# Altium PCB PcbForConverter.PcbDoc
Units mm, origin at the board's own origin, x right, y up, seen from the top; angles counter-clockwise.
Board outline 30 x 11 mm, 2 copper layers (Top Layer, Bottom Layer), stack 1.971 mm thick; 20 components, 20 nets, 94 pads, 41 vias.
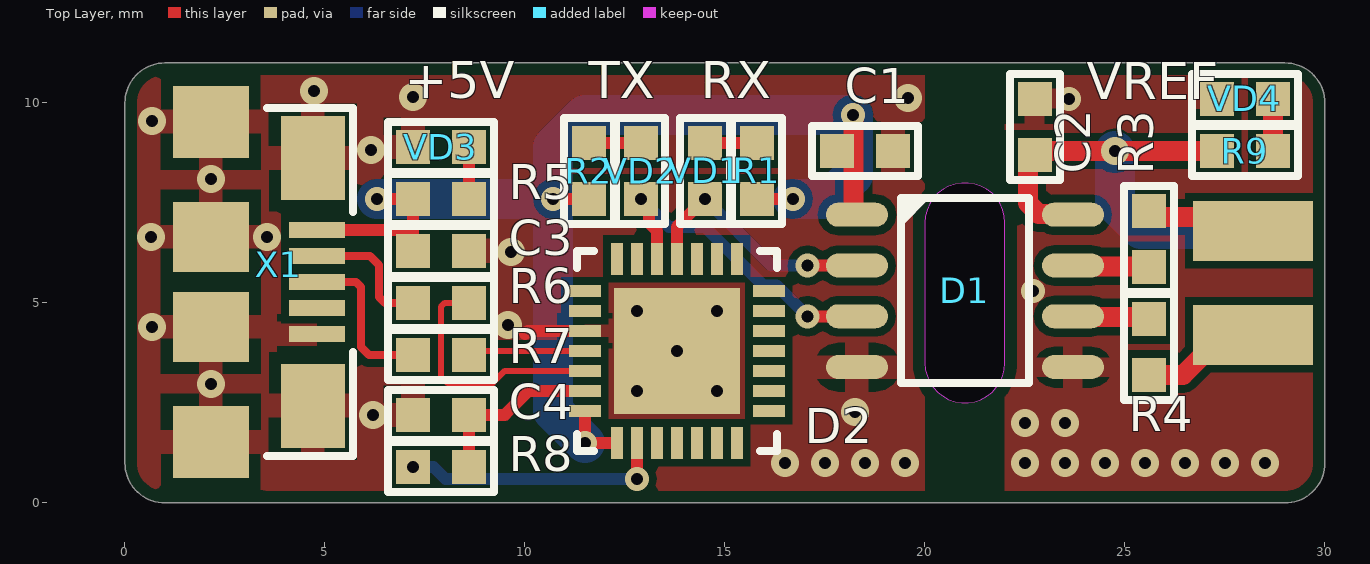
[diagram p0: Top Layer view]
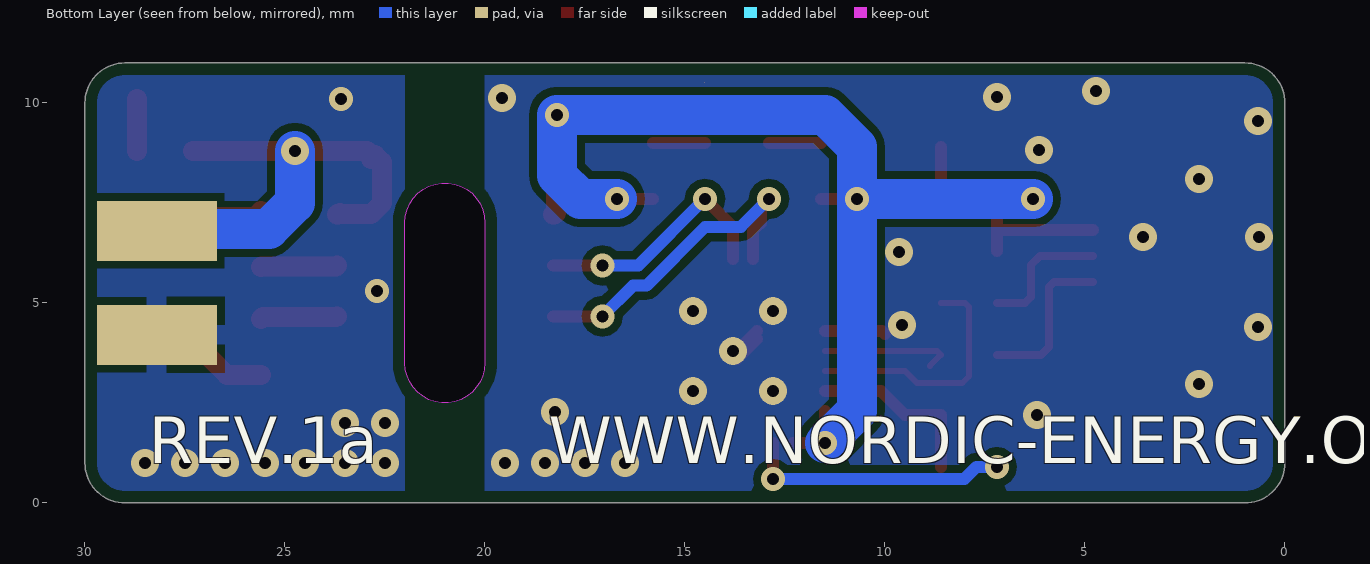
[diagram p1: Bottom Layer view, seen from below]
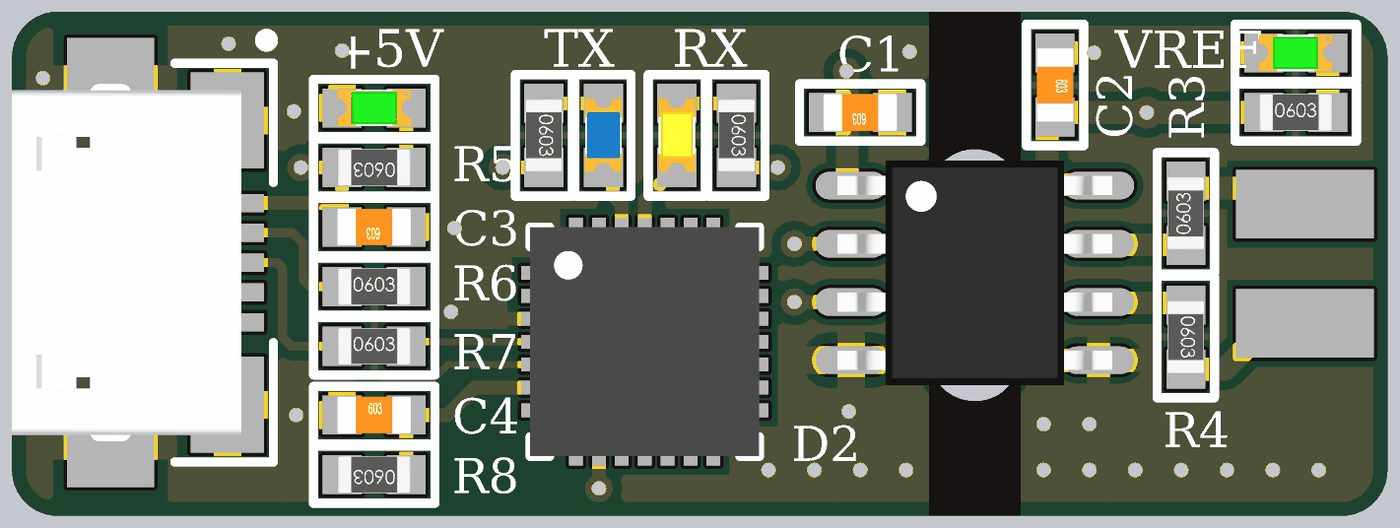
[diagram p2: 3D render of the assembled board from above, using the file's embedded part models]

## Layer stack, top to bottom
Top Solder: solder mask 0.0102, Solder Resist, Dk 3.5
Top Layer: signal copper 0.0356
Dielectric 1: dielectric 1.9, FR-4, Dk 4.8
Bottom Layer: signal copper 0.0356
Bottom Solder: solder mask 0.0102, Solder Resist, Dk 3.5

## Board outline
1,0 cw(c1,1) 0,1 0,10 cw(c1,10) 1,11 29,11 cw(c29,10) 30,10 30,1 cw(c29,1) 29,0
cut-out: 20,3.5 ccw(c21,3.5) 22,3.5 22,7 ccw(c21,7) 20,7
cut-out: 14.5,10.5

## Design rules (kind name [scope] priority, off if disabled: settings)
BoardOutlineClearance [All] p1: gap=0.3 ignorepadtopadclearanceinfootprint=FALSE
Clearance Clearance_NPTH [All vs InPadClass('NPTH')] p1: gap=0.4 ignorepadtopadclearanceinfootprint=FALSE except(0: Arc-Hole Track-Hole SMDPad-Hole THPad-Hole Via-Hole Fill-Hole Poly-Hole Region-Hole Text-Hole)
Clearance Clearance_MultiLayerPad [OnLayer('Multi-Layer') and IsPad] p2: gap=0.25 ignorepadtopadclearanceinfootprint=FALSE except(0: Arc-Hole Track-Hole SMDPad-Hole THPad-Hole Via-Hole Fill-Hole Poly-Hole Region-Hole Text-Hole)
Clearance Clearance_Polygon [InPolygon] p3: gap=0.2 ignorepadtopadclearanceinfootprint=FALSE except(0: Arc-Hole Track-Hole SMDPad-Hole THPad-Hole Via-Hole Fill-Hole Poly-Hole Region-Hole Text-Hole; 0.5: Poly-Poly)
Clearance [All] p4: gap=0.2 ignorepadtopadclearanceinfootprint=FALSE except(0: Arc-Hole Track-Hole SMDPad-Hole THPad-Hole Via-Hole Fill-Hole Poly-Hole Region-Hole Text-Hole)
Height [All] p1: minheight=0 maxheight=60 prefheight=12.7
HoleSize [All] p1: absolutevalues=TRUE maxlimit=5 minlimit=0.025 maxpercent=80.000 minpercent=20.000
HoleToHoleClearance [All] p1: gap=0.2 allowstackedmicrovias=TRUE
MinimumSolderMaskSliver [All] p1: minsoldermaskwidth=0.05
PlaneClearance [All] p1: clearance=0.5
PlaneConnect [All] p1: planeconnectstyle=Relief reliefexpansion=0.5 reliefentries=4 reliefconductorwidth=0.3 reliefairgap=0.2
PolygonConnect PolygonConnect_PowerPAD [All vs InPadClass('PowerPAD')] p1: connectstyle=Direct reliefconductorwidth=1 reliefentries=4 polygonreliefangle="90 Angle" airgapwidth=0.3
PolygonConnect PolygonConnect_PadGND [InNet('GND') and IsPad] p2: connectstyle=Relief reliefconductorwidth=0.5 reliefentries=4 polygonreliefangle="90 Angle" airgapwidth=0.2
PolygonConnect PolygonConnect_Via [IsVia] p3: connectstyle=Direct reliefconductorwidth=0.254 reliefentries=4 polygonreliefangle="90 Angle" airgapwidth=0.254
PolygonConnect [All] p4: connectstyle=Relief reliefconductorwidth=0.6 reliefentries=4 polygonreliefangle="90 Angle" airgapwidth=0.3
RoutingVias [All] p1: holewidth=0.3 width=0.7 viastyle="Through Hole" minholewidth=0.3 minwidth=0.6 maxholewidth=0.5 maxwidth=1.2
SilkToSilkClearance [All] p1: silktosilkclearance=0
SilkToSolderMaskClearance [IsPad] p1: minsilkscreentomaskgap=0.05 clearancetoexposedcopper=TRUE
SolderMaskExpansion [All] p1: expansion=0.075
Width [All] p1: maxlimit=10 minlimit=0.15 preferedwidth=0.15
22 further rules are at their usual default settings.

## Classes and differential pairs
pad class PowerPAD: D2-0

## Components (designator, comment, footprint, x,y, rotation, side; value= is the part's Value field where it differs from the comment)
C1 "Ceramic capacitor, 1μF, X7R, ±10%, 16V, 0603, -55...+125°C" "CAP: 0603" 18.5,8.8 r180 top value=1?F
C2 "Ceramic capacitor, 1μF, X7R, ±10%, 16V, 0603, -55...+125°C" "CAP: 0603" 22.75,9.4 r270 top value=1?F
C3 "Ceramic capacitor, 4.7μF, X7R, ±10%, 6.3V, 0603, -55...+125°C" "CAP: 0603" 7.9,6.3 r180 top value=4.7?F
C4 "Ceramic capacitor, 1μF, X7R, ±10%, 16V, 0603, -55...+125°C" "CAP: 0603" 7.9,2.2 r0 top value=1?F
D1 "IC digital isolator, 100Mbps, 3000Vrms, 2.25...5.5V, -55...+125°C, 8-SOIC" 8-SOIC 21,5.3 r0 top
D2 "IC usb-to-uart bridge, USB2.0, 3...3.6V, -40...+85°C, 28-VFQFN" "28-QFN (5x5)" 13.8,3.8 r0 top
R1 "Resistor film, 1k, ±5%, 0603, 0.1W, -55...+125°C" "RES: 0603" 15.8,8.3 r270 top value=1k
R2 "Resistor film, 1k, ±5%, 0603, 0.1W, -55...+125°C" "RES: 0603" 11.6,8.3 r270 top value=1k
R3 "Resistor film, 100R, ±5%, 0603, 0.1W, -55...+125°C" "RES: 0603" 25.6,6.6 r90 top value=100R
R4 "Resistor film, 100R, ±5%, 0603, 0.1W, -55...+125°C" "RES: 0603" 25.6,3.9 r270 top value=100R
R5 "Resistor film, 1k, ±5%, 0603, 0.1W, -55...+125°C" "RES: 0603" 7.9,7.6 r180 top value=1k
R6 "Resistor film, 22R, ±5%, 0603, 0.1W, -55...+125°C" "RES: 0603" 7.9,5 r0 top value=22R
R7 "Resistor film, 22R, ±5%, 0603, 0.1W, -55...+125°C" "RES: 0603" 7.9,3.7 r0 top value=22R
R8 "Resistor film, 1k, ±5%, 0603, 0.1W, -55...+125°C" "RES: 0603" 7.9,0.9 r180 top value=1k
R9 "Resistor film, 1k, ±5%, 0603, 0.1W, -55...+125°C" "RES: 0603" 28,8.8 r0 top value=1k
VD1 "LED, 20mA, 2V, 0603, -55...+150°C" "LED: 0603Y" 14.5,8.3 r270 top
VD2 "LED, 20mA, 3.2V, 0603, -55...+150°C" "LED: 0603B" 12.9,8.3 r270 top
VD3 "LED, 20mA, 2V, 0603, -55...+150°C" "LED: 0603G" 7.9,8.9 r180 top
VD4 "LED, 20mA, 2V, 0603, -55...+150°C" "LED: 0603G" 28,10.1 r180 top
X1 "USB micro B" "CON: USB micro-A (ZX62-B-5PA)" 4.8,5.525 r270 top

## Footprints (in the part's own frame and the unit in brackets; to place one, negate y for a bottom-side part, rotate by r counter-clockwise, add the part's x,y. Pads: shape width x height; smd on the part's side, far side on the other; paste and mask are expansions set on the pad)
8-SOIC [mm] "pitch 1.27 mm"
  rrect100% 1.55x0.6 smd: 1(-2.7,1.905) 2(-2.7,0.635) 3(-2.7,-0.635) 4(-2.7,-1.905) 5(2.7,-1.905) 6(2.7,-0.635) 7(2.7,0.635) 8(2.7,1.905)
  round 0.7 on Mech1: 28(-2.395,1.8)
  silkscreen extent -1.59,-2.3 1.61,2.33, body extent -3,-2.45 3,2.45, height 1.75
"28-QFN (5x5)" [mm] "5x5 mm, pitch 0.5 mm, power pad"
  round 0.7 hole 0.3: 0(-1,-1) 0(-1,1) 0(0,0) 0(1,-1) 0(1,1)
  rect 3.15x3.15 smd: 0(0,0)
  rect 0.8x0.3 smd: 1(-2.3,1.5) 2(-2.3,1) 3(-2.3,0.5) 4(-2.3,0) 5(-2.3,-0.5) 6(-2.3,-1) 7(-2.3,-1.5) 15(2.3,-1.5) 16(2.3,-1) 17(2.3,-0.5) 18(2.3,0) 19(2.3,0.5) 20(2.3,1) 21(2.3,1.5)
  rect 0.3x0.8 smd: 8(-1.5,-2.3) 9(-1,-2.3) 10(-0.5,-2.3) 11(0,-2.3) 12(0.5,-2.3) 13(1,-2.3) 14(1.5,-2.3) 22(1.5,2.3) 23(1,2.3) 24(0.5,2.3) 25(0,2.3) 26(-0.5,2.3) 27(-1,2.3) 28(-1.5,2.3)
  round 0.5 on Mech1: ""(-2,2)
  silkscreen extent -2.5,-2.5 2.5,2.5, body extent -2.5,-2.5 2.5,2.5, height 0.9
"CAP: 0603" [mm]
  rect 0.85x0.85 smd: 1(-0.7,0) 2(0.7,0)
  silkscreen extent -1.33,-0.63 1.33,0.63, body extent -0.8,-0.4 0.8,0.4, height 0.3
"CON: USB micro-A (ZX62-B-5PA)" [mm]
  rect 1.8x1.9 smd: 0(-4,-2.65) 0(4,-2.65)
  rect 2.1x1.6 smd: 0(-3.1,-0.1) 0(3.1,-0.1)
  rect 1.75x1.9 smd: 0(-1.125,-2.65) 0(1.125,-2.65)
  rect 0.4x1.4 smd: 1(-1.3,0) 2(-0.65,0) 3(0,0) 4(0.65,0) 5(1.3,0)
  round 0.5 on Top Overlay: ""(-4.85,0.75)
  silkscreen extent -4.35,-1.25 4.35,0.9, body extent -3.9,-4.8 3.9,0.2, height 2.68
"LED: 0603B" [mm]
  rect 0.85x0.85 smd: 1(-0.7,0) 2(0.7,0)
  silkscreen extent -1.33,-0.63 1.33,0.6, body extent -0.8,-0.4 0.8,0.4, height 0.6
"LED: 0603G" [mm]
  rect 0.85x0.85 smd: 1(-0.7,0) 2(0.7,0)
  silkscreen extent -1.33,-0.63 1.33,0.63, body extent -0.8,-0.4 0.8,0.4, height 0.6
"LED: 0603Y" [mm]
  rect 0.85x0.85 smd: 1(-0.7,0) 2(0.7,0)
  silkscreen extent -1.33,-0.63 1.33,0.63, body extent -0.8,-0.4 0.8,0.4, height 0.6
"RES: 0603" [mm]
  rect 0.85x0.85 smd: 1(-0.7,0) 2(0.7,0)
  silkscreen extent -1.33,-0.63 1.33,0.63, body extent -0.8,-0.4 0.8,0.4, height 0.44

## Part data
C1 C2 C4: library part Ceramic_0603, Manufacturer=Samsung, Package=0603, PartNumber=CL10B105KO8NNNC, Temperature=-55...+125°C, Tolerance=±10%, TypeCapacitor="Ceramic capacitor", TypeDielectric=X7R, ValueManufacturerPartNumber="Ceramic capacitor, 1?F, X7R, ±10%, 16V, 0603, -55...+125°C", Voltage=16V, HelpURL=https://www.digikey.com/product-detail/en/samsung-electro-mechanics/CL10B105KO8NNNC/1276-1019-1-ND/3889105
C3: library part Ceramic_0603, Manufacturer=Samsung, Package=0603, PartNumber=CL10B475KQ8NQNC, Temperature=-55...+125°C, Tolerance=±10%, TypeCapacitor="Ceramic capacitor", TypeDielectric=X7R, ValueManufacturerPartNumber="Ceramic capacitor, 4.7?F, X7R, ±10%, 6.3V, 0603, -55...+125°C", Voltage=6.3V, HelpURL=https://www.digikey.com/product-detail/en/samsung-electro-mechanics/CL10B475KQ8NQNC/1276-2087-1-ND/3890173
D1: library part ISO7721DR, "Digital isolator", Manufacturer="Texas Instruments", Package=8-SOIC, Temperature=-55...+125°C, ComponentType="IC digital isolator", DataRate=100Mbps, HelpURL=https://www.digikey.com/product-detail/en/texas-instruments/ISO7721DR/296-48296-1-ND/8347715, Isolation=3000Vrms, PartNumber=ISO7721DR, Supply=2.25...5.5V, ValueManufacturerPartNumber="IC digital isolator, 100Mbps, 3000Vrms, 2.25...5.5V, -55...+125°C, 8-SOIC"
D2: library part CP2102N, "USB-to-UART", Manufacturer="Silicon Labs", Package=28-VFQFN, PartNumber=CP2102N-A02-GQFN28, Temperature=-40...+85°C, ComponentType="IC usb-to-uart bridge", HelpURL=https://www.digikey.com/product-detail/en/silicon-labs/CP2102N-A02-GQFN28/336-5889-ND/9863477, Standard=USB2.0, Supply=3...3.6V, ValueManufacturerPartNumber="IC usb-to-uart bridge, USB2.0, 3...3.6V, -40...+85°C, 28-VFQFN"
R1 R2 R5 R8 R9: library part Resistor_0603, Manufacturer=Yageo, Package=0603, PartNumber=RC0603JR-071KL, Power=0.1W, Temperature=-55...+125°C, Tolerance=±5%, TypeResistor="Resistor film", HelpURL=https://www.digikey.com/product-detail/en/yageo/RC0603JR-071KL/311-1.0KGRCT-ND/729624, ValueManufacturerPartNumber="Resistor film, 1k, ±5%, 0603, 0.1W, -55...+125°C"
R3 R4: library part Resistor_0603, Manufacturer=Yageo, Package=0603, PartNumber=RC0603JR-07100RL, Power=0.1W, Temperature=-55...+125°C, Tolerance=±5%, TypeResistor="Resistor film", HelpURL=https://www.digikey.com/product-detail/en/yageo/RC0603JR-07100RL/311-100GRCT-ND/729644, ValueManufacturerPartNumber="Resistor film, 100R, ±5%, 0603, 0.1W, -55...+125°C"
R6 R7: library part Resistor_0603, Manufacturer=Yageo, Package=0603, PartNumber=RC0603JR-0722RL, Power=0.1W, Temperature=-55...+125°C, Tolerance=±5%, TypeResistor="Resistor film", HelpURL=https://www.digikey.com/product-detail/en/yageo/RC0603JR-0722RL/311-22GRCT-ND/729690, ValueManufacturerPartNumber="Resistor film, 22R, ±5%, 0603, 0.1W, -55...+125°C"
VD1: library part LED_single, Color=YELLOW, Current=20mA, Manufacturer=Wurth, Package=0603, PartNumber=150060YS75000, Temperature=-55...+150°C, VoltageDrop=2V, HelpURL=https://www.digikey.com/product-detail/en/wurth-electronics-inc/150060YS75000/732-4981-1-ND/4489907, TypeDiode=LED, ValueManufacturerPartNumber="LED, 20mA, 2V, 0603, -55...+150°C"
VD2: library part LED_single, Color=BLUE, Current=20mA, Manufacturer=Wurth, Package=0603, PartNumber=150060BS75000, Temperature=-55...+150°C, VoltageDrop=3.2V, HelpURL=https://www.digikey.com/product-detail/en/wurth-electronics-inc/150060BS75000/732-4966-1-ND/4489893, TypeDiode=LED, ValueManufacturerPartNumber="LED, 20mA, 3.2V, 0603, -55...+150°C"
VD3 VD4: library part LED_single, Color=GREEN, Current=20mA, Manufacturer=Wurth, Package=0603, PartNumber=150060VS75000, Temperature=-55...+150°C, VoltageDrop=2V, HelpURL=https://www.digikey.com/product-detail/en/wurth-electronics-inc/150060VS75000/732-4980-1-ND/4489904, TypeDiode=LED, ValueManufacturerPartNumber="LED, 20mA, 2V, 0603, -55...+150°C"
X1: library part Connector_USB_micro_B, Manufacturer="Hirose Electric", PartNumber=ZX62-B-5PA, CommentText="\"USB\"", HelpURL=https://www.digikey.com/product-detail/en/hirose-electric-co-ltd/ZX62-B-5PA/H11579CT-ND/1851090, TypeConnector="USB micro B", ValueManufacturerPartNumber="USB micro B"

## Free pads (board coordinates)
  rect 3x1.5 smd: ""(28.2,4.2) ""(28.2,6.8)
  rect 3x1.5 smd far side: ""(28.2,4.2) ""(28.2,6.8)

## Via types
v1: diameter 0.7, hole 0.3, Top Layer to Bottom Layer, tented both sides, 28 vias
v2: diameter 0.6, hole 0.3, Top Layer to Bottom Layer, tented both sides, 13 vias

## Nets (pads, with @x,y where several pads share a name; then routed paths per layer and width w, separated by ;. In a path a pad name is that pad's centre, name@x,y a point inside that pad or via, vN(x,y) a via of type N, cw(c..) or ccw(c..) an arc to the next point about the centre after c; other vN are vias at no path point)
GND: C2.1 D1.5 pad.@28.2,4.2 VD4.2
  other v1: 22.5,1 23.5,1 24.5,1 25.5,1 26.5,1 27.5,1 28.5,1 22.5,2 23.5,2
  other v2: 22.7,5.3 23.6,10.1
GND2: C1.1 C3.1 C4.1 D1.4 D2.0 D2.3 VD3.2 X1.0 X1.5 | length 3.2
  Top Layer w0.3: 10,4.225 10.075,4.3 D2.3 ; D2.0@13.192,4.1 13.692,3.6 D2.0@13.8,3.7 ; D2.0@13.192,4.3 13.692,3.8 D2.0@13.8,3.8
  other v1: 16.5,1 17.5,1 18.5,1 19.5,1 6.2,2.2 18.25,2.275 2.15,2.975 0.675,4.4 9.575,4.45 9.65,6.275 0.65,6.65 3.55,6.65 2.15,8.1 6.15,8.825 0.675,9.55 19.575,10.125 7.2,10.15 4.725,10.3
NetC4_2: C4.2 D2.6 R8.1 | length 4.4
  Top Layer w0.3: R8.1 C4.2 9.5,2.2 10.1,2.8 D2.6
NetD1_2: D1.2 D2.25 VD1.2 | length 6.3
  Top Layer w0.3: D2.25 13.8,6.9 v2(14.5,7.6) ; v2(17.065,5.935) D1.2
  Bottom Layer w0.3: v2(14.5,7.6) 16.165,5.935 v2(17.065,5.935)
NetD1_3: D1.3 D2.26 VD2.2 | length 8.3
  Top Layer w0.3: v2(12.9,7.6) 13.1,7.4 13.1,7 13.3,6.8 D2.26 ; v2(17.065,4.665) D1.3
  Bottom Layer w0.3: v2(12.9,7.6) 13.6,6.9 14.493,6.9 15.958,5.435 16.295,5.435 v2(17.065,4.665)
NetD1_6: D1.6 R4.1 | length 1.9
  Top Layer w0.5: D1.6 23.719,4.646 25.554,4.646 R4.1
NetD1_7: D1.7 R3.1 | length 1.9
  Top Layer w0.5: D1.7 23.719,5.916 25.584,5.916 R3.1
NetD2_4: D2.4 R7.2 | length 3.3
  Top Layer w0.15: R7.2@8.875,3.425 R7.2 8.7,3.8 D2.4
NetD2_5: D2.5 R6.2 | length 6.3
  Top Layer w0.15: R6.2 8,5 7.9,4.9 7.9,3.161 8.061,3 9.2,3 9.5,3.3 D2.5
NetD2_9: D2.9 R8.2 | length 6.4
  Top Layer w0.3: v2@12.8,0.8 D2.9
  Bottom Layer w0.3: v2(7.2,0.9) 7.712,0.9 8.012,0.6 v2(12.8,0.6)
NetR1_1: R1.1 VD1.1 | length 1.3
  Top Layer w0.3: VD1.1 R1.1
NetR2_1: R2.1 VD2.1 | length 1.3
  Top Layer w0.3: R2.1 VD2.1
NetR5_1: R5.1 VD3.1 | length 1.3
  Top Layer w0.3: R5.1 VD3.1
NetR6_1: R6.1 X1.2 | length 3.4
  Top Layer w0.2: X1.2 6.125,6.175 6.354,5.946 6.354,5.149 6.503,5 R6.1
NetR7_1: R7.1 X1.3 | length 4
  Top Layer w0.2: X1.3 5.775,5.525 5.9,5.4 5.9,3.9 6.1,3.7 R7.1
NetR9_2: R9.2 VD4.1 | length 1.3
  Top Layer w0.5: R9.2 VD4.1
USART-RX: pad.@28.2,6.8 R3.2 | length 2.8
  Top Layer w0.5: R3.2 25.75,7.15 27.85,7.15 pad.@28.2,6.8
USART-TX: pad.@28.2,4.2 R4.2 | length 3
  Top Layer w0.5: R4.2 26.45,3.2 27.45,4.2 pad.@28.2,4.2
VCC5V-USB: C1.2 C3.2 D1.1 D2.7 D2.8 R1.2 R2.2 R5.2 X1.1 | length 33.8
  Top Layer w0.3: X1.1 7.2,6.825 ; v2(6.3,7.6) R5.2 7.2,6.825 ; C3.2 7.2,6.825 ; v2(10.7,7.6) R2.2 ; D2.7 v2(11.5,1.5) D2.8 ; R1.2 v2(16.7,7.6)
  Top Layer w0.5: v2(18.2,9.7) 18.219,9.681 18.219,7.251 18.265,7.205 D1.1
  Bottom Layer w1: v2(6.3,7.6) v2(10.7,7.6) ; v2(11.5,1.5) 10.7,2.3 v2(10.7,7.6) ; v2(16.7,7.6) 17.614,7.6 18.2,8.186 v2(18.2,9.7) 11.5,9.7 10.7,8.9 v2(10.7,7.6)
VREF: C2.2 D1.8 pad.@28.2,6.8 R9.1 | length 12.3
  Top Layer w0.5: C2.2 22.575,8.525 22.575,7.492 22.843,7.224 D1.8@23.652,7.224 ; C2.2@22.8,8.6 C2.2@22.85,8.6 ; C2.2@22.8,8.65 22.95,8.8 v1(24.75,8.8) R9.1 ; D1.8@23.625,7.251 D1.8@23.652,7.224 ; D1.8@23.652,7.224 23.681,7.224 D1.8 23.671,7.205 D1.8@23.652,7.224
  Bottom Layer w1: v1(24.75,8.8) 24.75,7.5 25.4,6.85 28.15,6.85 pad.@28.2,6.8
pads on no net: D1.28 D2. D2.1 D2.2 D2.10 D2.11 D2.12 D2.13 D2.14 D2.15 D2.16 D2.17 D2.18 D2.19 D2.20 D2.21 D2.22 D2.23 D2.24 D2.27 D2.28 X1. X1.4

## Polygon pours and split planes (outlines as drawn)
GND2 on Top Layer "Top Layer-GND2" (solid, remove dead copper, pour order 0): 0,0 0,11 20,11 20,0
GND on Top Layer "Top Layer-GND" (solid, remove dead copper, pour order 6): 22,0 22,11 30,11 30,0
no net on Top Layer "Top Layer-No Net" (solid, remove dead copper, pour order 4): 33,5
GND2 on Bottom Layer "Bottom Layer-GND2" (solid, remove dead copper, pour order 2): 0,0 0,11 20,11 20,0
GND on Bottom Layer "Bottom Layer-GND" (solid, remove dead copper, pour order 8): 22,0 22,11 30,11 30,0

## Other copper
Top Layer:
  pour cut-out: 20,0 20,11 22,11 22,0
Bottom Layer:
  region: -1,9
  pour cut-out: 20,0 20,11 22,11 22,0

## Silkscreen, mask and mechanical layers (free items; w line width, h text height)
Top Overlay:
  text "+5V" at 7,9.8 h1.6
  text "TX" at 11.6,9.8 h1.6
  text "TX" at 11.6,9.8 h1.6
  text "RX" at 14.4,9.8 h1.6
  text "VREF" at 24.05,9.775 h1.6
Bottom Overlay:
  text "WWW.NORDIC-ENERGY.ORG" at 18.4,0.6 h2
  text "REV.1a" at 28.4,0.6 h2
Top Solder:
  rectangle: 20,0 22,11
Bottom Solder:
  rectangle: 20,0 22,11
Border:
  lines w0.2: 0,1 ccw(c1,1) 1,0 29,0 ccw(c29,1) 30,1 30,10 ccw(c29,10) 29,11 1,11 ccw(c1,10) 0,10 0,1 ; 20,3.5 ccw(c21,3.5) 22,3.5 22,7 ccw(c21,7) 20,7 20,3.5

## Dimensions
0,0 to 0,11 on Size
0,11 to 30,11 on Size